# EAGLE board 8051 with lcd (EAGLE 6.5.0)
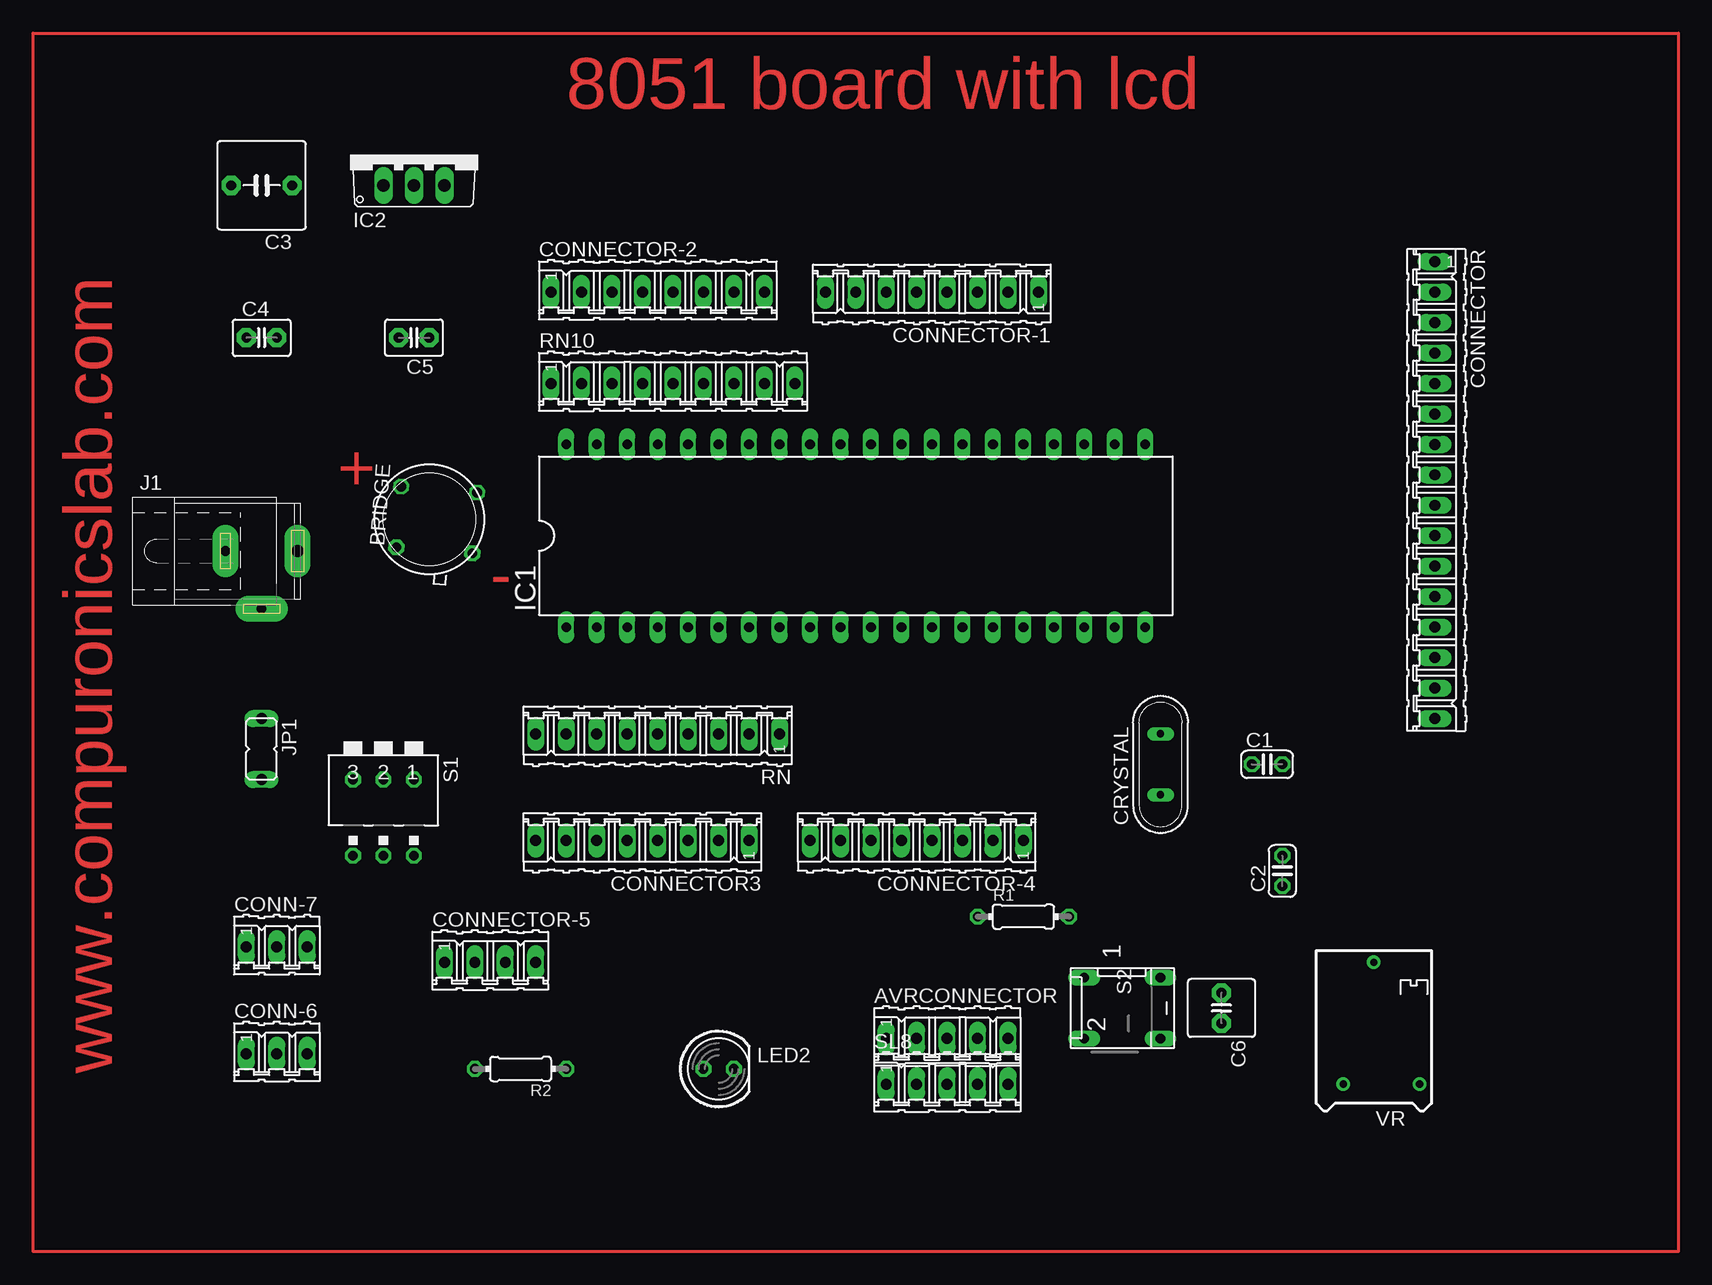
[diagram p0: board, top side]
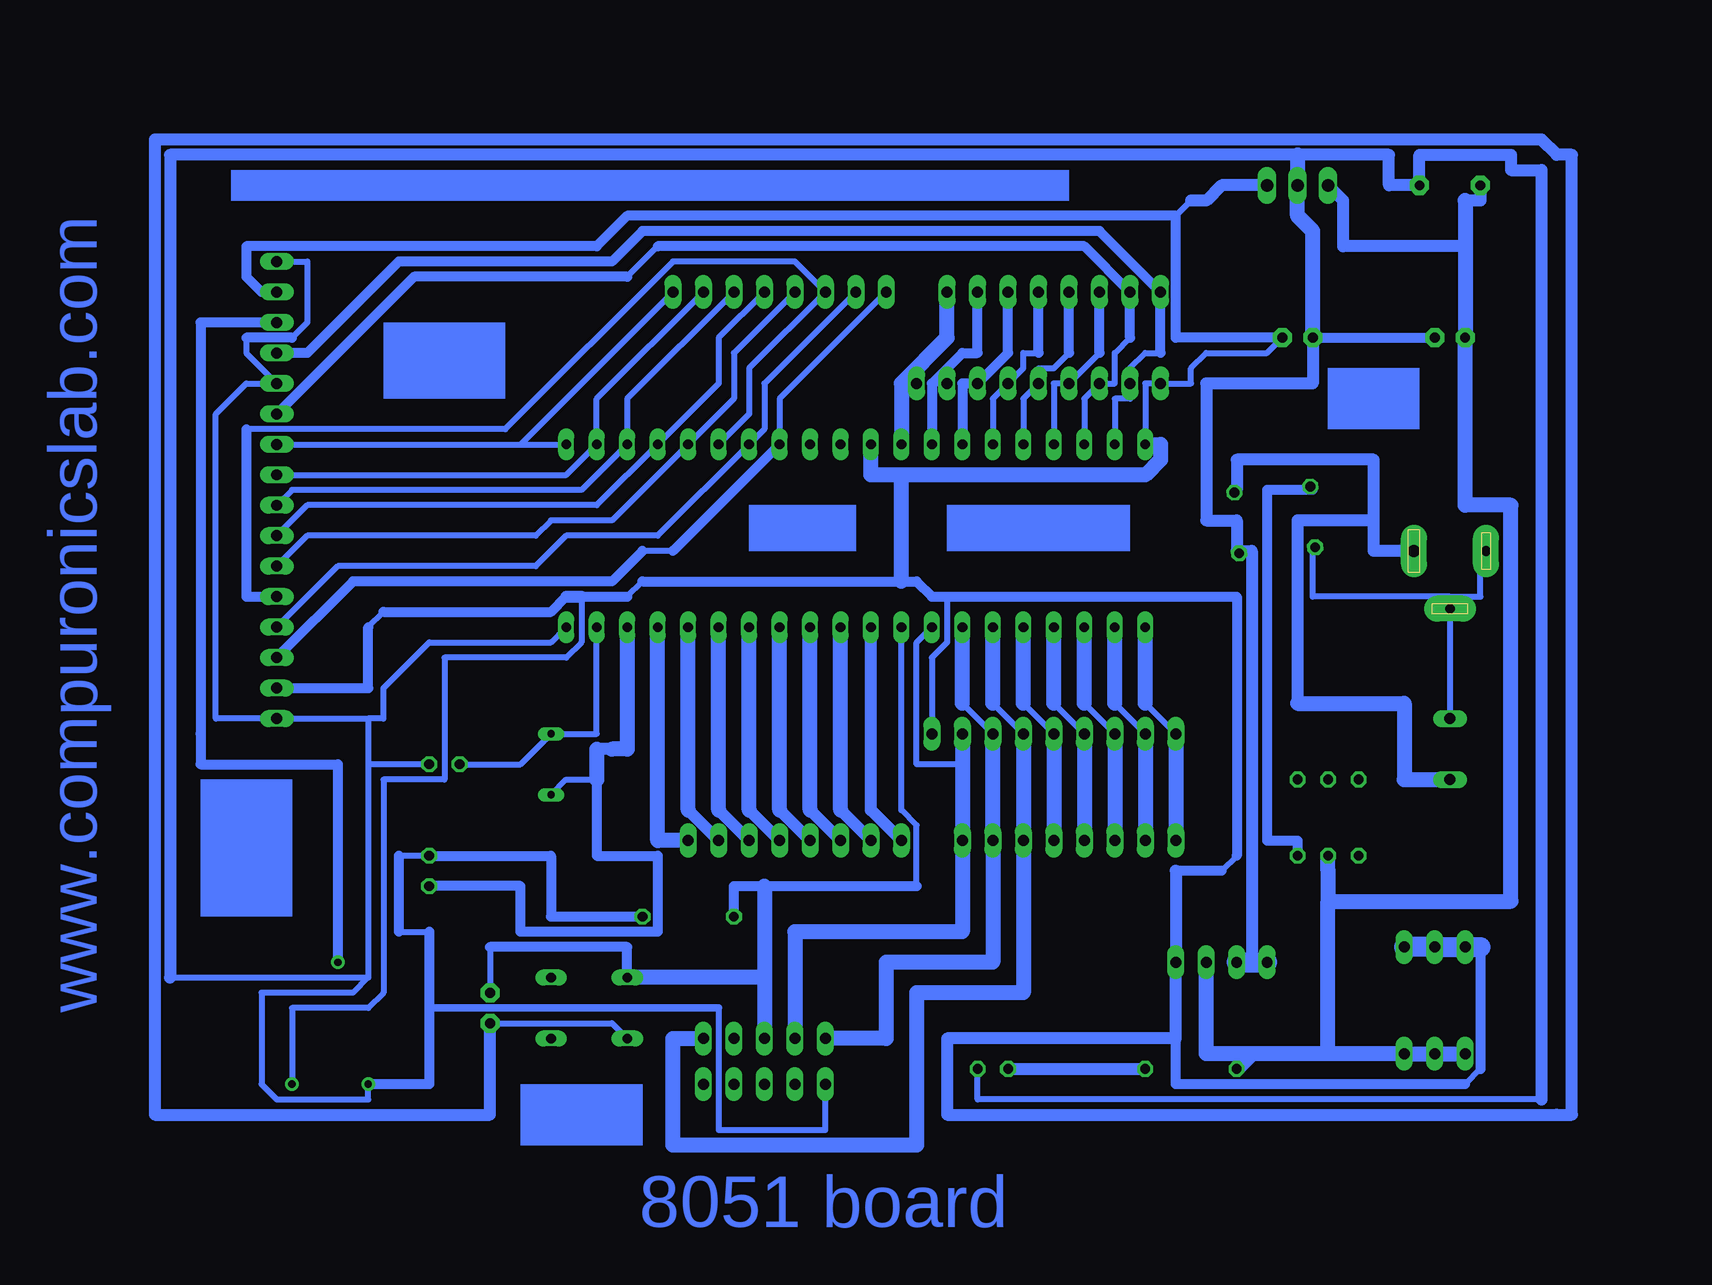
[diagram p1: board, bottom side, seen from below]

No outline drawn. Coordinates in mm, seen from the top.
Copper layers (1*16): Top 0.035mm / dielectric 1.5mm / Bottom 0.035mm
Design rules "default *": minimum track width 20mil, minimum drill 24mil, track to track 20mil, track to pad 8mil, pad to pad 8mil, via to via 8mil, smd to smd 8mil, copper to edge 20mil, drill to drill 8mil, minimum pad ring 10mil, minimum via ring 8mil, stop-mask expansion 8mil, vias tented up to drill 0mil, thermal gap 20mil

## Footprints (pad centres in the part's own frame; a part is rotated, then mirrored left to right if it is on the bottom)
05P = drill 0.914 long: 1 -5.08,0; 2 -2.54,0; 3 0,0; 4 2.54,0; 5 5.08,0
TO39/4 = drill 0.813 octagon: 1 -2.54,-2.54; 2 2.54,-2.54; 3 2.54,3.81; 4 -2.54,3.81
C025-024X044 = drill 0.813 octagon: 1 -1.27,0; 2 1.27,0
C5B7.2 = drill 0.813 pad 1.6 octagon: 1 -2.54,0; 2 2.54,0
C2.5-3 = drill 0.813 pad 1.6 octagon: 1 -1.27,0; 2 1.27,0
C2.5-6 = drill 0.813 pad 1.6 octagon: 1 -1.27,0; 2 1.27,0
03P = drill 0.914 long: 1 -2.54,0; 2 0,0; 3 2.54,0
16P = drill 0.914 long: 1 -19.05,0; 2 -16.51,0; 3 -13.97,0; 4 -11.43,0; 5 -8.89,0; 6 -6.35,0; 7 -3.81,0; 8 -1.27,0; 9 1.27,0; 10 3.81,0; 11 6.35,0; 12 8.89,0; 13 11.43,0; 14 13.97,0; 15 16.51,0; 16 19.05,0
08P = drill 0.914 long: 1 -8.89,0; 2 -6.35,0; 3 -3.81,0; 4 -1.27,0; 5 1.27,0; 6 3.81,0; 7 6.35,0; 8 8.89,0
04P = drill 0.914 long: 1 -3.81,0; 2 -1.27,0; 3 1.27,0; 4 3.81,0
QS = drill 0.61 long: 1 -2.54,0; 2 2.54,0
DIL40 = drill 0.813 long: 1 -24.13,-7.62; 2 -21.59,-7.62; 3 -19.05,-7.62; 4 -16.51,-7.62; 5 -13.97,-7.62; 6 -11.43,-7.62; 7 -8.89,-7.62; 8 -6.35,-7.62; 9 -3.81,-7.62; 10 -1.27,-7.62; 11 1.27,-7.62; 12 3.81,-7.62; 13 6.35,-7.62; 14 8.89,-7.62; 15 11.43,-7.62; 16 13.97,-7.62; 17 16.51,-7.62; 18 19.05,-7.62; 19 21.59,-7.62; 20 24.13,-7.62; 21 24.13,7.62; 22 21.59,7.62; 23 19.05,7.62; 24 16.51,7.62; 25 13.97,7.62; 26 11.43,7.62; 27 8.89,7.62; 28 6.35,7.62; 29 3.81,7.62; 30 1.27,7.62; 31 -1.27,7.62; 32 -3.81,7.62; 33 -6.35,7.62; 34 -8.89,7.62; 35 -11.43,7.62; 36 -13.97,7.62; 37 -16.51,7.62; 38 -19.05,7.62; 39 -21.59,7.62; 40 -24.13,7.62
TO220V = drill 1.016 long: 1 -2.54,-2.54; 2 0,-2.54; 3 2.54,-2.54
SPC4077 = drill 0.8 pad 2.184 long: 1 -3,0; 2 0,-4.8 | drill 1 pad 2.184 long: 3 3,0
JP1 = drill 0.914 long: 1 0,-2.54; 2 0,2.54
LED5MM = drill 0.813 octagon: A -1.27,0; K 1.27,0
0204/7 = drill 0.813 octagon: 1 -3.81,0; 2 3.81,0
09P = drill 0.914 long: 1 -10.16,0; 2 -7.62,0; 3 -5.08,0; 4 -2.54,0; 5 0,0; 6 2.54,0; 7 5.08,0; 8 7.62,0; 9 10.16,0
DA-03 = drill 0.813 octagon: 1 -2.54,-5.08; 2 0,-5.08; 3 2.54,-5.08; 4 2.54,1.27; 5 0,1.27; 6 -2.54,1.27
DP-02 = drill 0.813 long: 1 -2.54,-2.54; 2 2.54,-2.54; 3 2.54,3.81; 4 -2.54,3.81
RTRIM64P = drill 0.61: 1 -2.54,-3.81; 2 7.62,0; 3 -2.54,2.54

## Placement (x,y rotation side)
AVRCONNECTOR  [05P]  60.96,3.81 0 top
BRIDGE  [TO39/4]  19.05,46.99 85.6 top
C1  33pf  [C025-024X044]  87.63,26.67 0 top
C2  33pf  [C025-024X044]  88.9,17.78 90 top
C3  470uf  [C5B7.2]  3.81,74.93 180 top
C4  .01uf  [C2.5-3]  3.81,62.23 0 top
C5  4.7uf  [C2.5-3]  16.51,62.23 180 top
C6  0.1uf  [C2.5-6]  83.82,6.35 270 top
CONN-6  3 pin  [03P]  5.08,2.54 0 top
CONN-7  3 pin  [03P]  5.08,11.43 0 top
CONNECTOR  LCD  [16P]  101.6,49.53 270 top
CONNECTOR3  8 pin  [08P]  35.56,20.32 180 top
CONNECTOR-1  8 pin  [08P]  59.69,66.04 180 top
CONNECTOR-2  8 pin  [08P]  36.83,66.04 0 top
CONNECTOR-4  8 pin  [08P]  58.42,20.32 180 top
CONNECTOR-5  4 pin  [04P]  22.86,10.16 0 top
CRYSTAL  11.0592 mhz  [QS]  78.74,26.67 90 top
IC1  AT89S51  [DIL40]  53.34,45.72 0 top
IC2  7805TV  [TO220V]  16.51,77.47 0 top
J1  [SPC4077]  3.81,44.45 0 top
JP1  TRANSFORMER  [JP1]  3.81,27.94 180 top
LED2  5mm  [LED5MM]  41.91,1.27 0 top
R1  10k  [0204/7]  67.31,13.97 0 top
R2  560E  [0204/7]  25.4,1.27 180 top
RN  10K  [09P]  36.83,29.21 180 top
RN10  10 k  [09P]  38.1,58.42 0 top
S1  ON/ OFF SWITCH  [DA-03]  13.97,20.32 180 top
S2  push switch  [DP-02]  74.93,6.35 270 top
SL8  [05P]  60.96,0 0 top
VR  10k  [RTRIM64P]  96.52,2.54 90 top

## Library data of the parts
AVRCONNECTOR CONN-6 CONN-7 CONNECTOR CONNECTOR3 CONNECTOR-1 CONNECTOR-2 CONNECTOR-4 CONNECTOR-5 RN RN10 SL8 = con-amp-quick; OC_FARNELL: unknown; OC_NEWARK: unknown
BRIDGE IC2 = linear
C1 C2 = rcl
C3-C6 = capacitor-wima
CRYSTAL = special
IC1 = atmel; OC_FARNELL: unknown; OC_NEWARK: unknown
J1 = con-jack; OC_FARNELL: unknown; OC_NEWARK: unknown
JP1 = jumper
LED2 = led
R1 R2 = eagle-ltspice; SPICEMODEL: NONE; SPICEPREFIX: R
S1 = switch-dil; MPN: MCDA03; OC_FARNELL: 1521999; OC_NEWARK: 74M2972
S2 = switch-dil; MPN: MCDP02; OC_FARNELL: 1255233; OC_NEWARK: 26M1095
VR = resistor

## Nets
N$1: C2.1 CRYSTAL.1 IC1.18
N$2: C1.1 CRYSTAL.2 IC1.19
N$4: C3.2 C4.1 CONN-6.1 CONN-6.2 CONN-6.3 CONNECTOR-5.3 IC2.1 R2.2 S1.5
N$5: BRIDGE.2 J1.3 JP1.2
N$6: CONNECTOR-4.8 IC1.10
N$7: CONNECTOR-4.7 IC1.11
N$8: CONNECTOR-4.6 IC1.12
N$9: CONNECTOR-4.5 IC1.13
N$10: CONNECTOR-4.4 IC1.14
N$11: CONNECTOR-4.3 IC1.15
N$12: CONNECTOR-4.2 IC1.16
N$13: CONNECTOR-4.1 IC1.17
N$14: AVRCONNECTOR.3 C6.1 IC1.9 R1.1 S2.1
N$15: AVRCONNECTOR.1 CONNECTOR3.2 IC1.7 RN.3
N$16: BRIDGE.4 J1.1 J1.2 JP1.1
N$17: CONNECTOR3.4 IC1.5 RN.5
N$18: CONNECTOR3.5 IC1.4 RN.6
N$19: CONNECTOR3.6 IC1.3 RN.7
N$20: CONNECTOR3.7 IC1.2 RN.8
N$21: CONNECTOR3.8 IC1.1 RN.9
N$24: CONNECTOR-2.3 IC1.37 RN10.4
N$25: CONNECTOR-2.4 IC1.36 RN10.5
N$26: CONNECTOR-2.5 IC1.35 RN10.6
N$27: CONNECTOR-2.6 IC1.34 RN10.7
N$28: CONNECTOR-2.7 IC1.33 RN10.8
N$29: CONNECTOR-2.8 IC1.32 RN10.9
N$30: CONNECTOR-1.1 CONNECTOR.7 IC1.21
N$31: CONNECTOR-1.2 CONNECTOR.8 IC1.22
N$32: CONNECTOR-1.3 CONNECTOR.9 IC1.23
N$35: CONNECTOR-1.6 CONNECTOR.12 IC1.26
N$38: CONNECTOR.3 VR.2
N$39: C5.1 C6.2 CONN-7.1 CONN-7.2 CONN-7.3 CONNECTOR-5.4 CONNECTOR.2 CONNECTOR.15 IC1.31 IC1.40 IC2.3 RN10.1 RN.1 S2.2 VR.1
N$41: BRIDGE.1 C1.2 C2.2 C3.1 C4.2 C5.2 CONNECTOR-5.1 CONNECTOR-5.2 CONNECTOR.1 CONNECTOR.5 CONNECTOR.16 IC1.20 IC2.2 LED2.K R1.2 SL8.1 VR.3
N$42: AVRCONNECTOR.5 CONNECTOR3.3 IC1.6 RN.4
N$43: LED2.A R2.1
N$45: AVRCONNECTOR.2 CONNECTOR3.1 IC1.8 RN.2
N$47: BRIDGE.3 S1.6
N$48: CONNECTOR-2.2 CONNECTOR.6 IC1.38 RN10.3
N$51: CONNECTOR-1.4 CONNECTOR.10 IC1.24
N$52: CONNECTOR-1.5 CONNECTOR.11 IC1.25
N$54: CONNECTOR-1.7 CONNECTOR.13 IC1.27
N$55: CONNECTOR-1.8 CONNECTOR.14 IC1.28
N$58: CONNECTOR-2.1 CONNECTOR.4 IC1.39 RN10.2

## Tracks (layer width: path | path; a pad name or v marks a point on that pad's centre or on a via)
N$1
  Bottom 0.508: CRYSTAL.1 77.47,25.4 74.93,25.4
  Bottom 0.813: C2.1 81.28,16.51 81.28,12.7 69.85,12.7 69.85,19.05 74.93,19.05 74.93,25.4
  Bottom 1.016: 73.66,27.94 74.93,27.94
  Bottom 1.27: 74.93,27.94 74.93,25.4 | 73.66,27.94 72.39,27.94 IC1.18
N$2
  Bottom 0.508: C1.1 81.28,26.67 CRYSTAL.2 74.93,29.21 IC1.19
N$3
  Top 0.254: -15.24,87.63 121.92,87.63 121.92,-13.97 -15.24,-13.97 -15.24,87.63
N$4
  Bottom 0.508: 2.54,73.66 2.54,69.85
  Bottom 1.016: IC2.1 12.7,73.66 12.7,69.85 2.54,69.85 | C3.2 1.27,73.66 2.54,73.66
  Bottom 1.27: 2.54,73.66 C4.1 2.54,48.26 -1.27,48.26 -1.27,15.24 13.97,15.24 | CONN-6.1 CONN-6.2 CONN-6.3 13.97,2.54 | 13.97,2.54 13.97,15.24 | S1.5 13.97,17.78 13.97,15.24 | 20.32,2.54 R2.2 | 13.97,2.54 20.32,2.54 | 20.32,2.54 24.13,2.54 CONNECTOR-5.3
N$5
  Bottom 0.508: 21.59,49.53 BRIDGE.2
  Bottom 1.016: 21.59,49.53 21.59,52.07 10.16,52.07 10.16,46.99 | J1.3 10.16,44.45 10.16,46.99 | 16.51,31.75 16.51,46.99 10.16,46.99
  Bottom 1.27: 16.51,31.75 7.62,31.75 7.62,25.4 JP1.2
N$6
  Bottom 1.016: IC1.10 52.07,22.86 CONNECTOR-4.8
N$7
  Bottom 1.016: CONNECTOR-4.7 54.61,22.86
  Bottom 1.27: 54.61,22.86 IC1.11
N$8
  Bottom 1.016: CONNECTOR-4.6 57.15,22.86
  Bottom 1.27: 57.15,22.86 IC1.12
N$9
  Bottom 1.016: CONNECTOR-4.5 59.69,22.86
  Bottom 1.27: 59.69,22.86 IC1.13
N$10
  Bottom 1.016: CONNECTOR-4.4 62.23,22.86
  Bottom 1.27: 62.23,22.86 IC1.14
N$11
  Bottom 1.016: CONNECTOR-4.3 64.77,22.86
  Bottom 1.27: 64.77,22.86 IC1.15
N$12
  Bottom 1.016: CONNECTOR-4.2 67.31,22.86
  Bottom 1.27: 67.31,22.86 IC1.16
N$13
  Bottom 1.27: IC1.17 69.85,20.32 CONNECTOR-4.1
N$14
  Bottom 0.508: IC1.9 49.53,22.86 48.26,21.59 48.26,16.51 | 83.82,11.43 C6.1
  Bottom 0.813: 48.26,16.51 60.96,16.51 63.5,16.51 R1.1 | S2.1 72.39,11.43 83.82,11.43
  Bottom 1.27: 60.96,16.51 60.96,8.89 | 60.96,8.89 AVRCONNECTOR.3 | 60.96,8.89 S2.1
N$15
  Bottom 0.508: RN.3 44.45,31.75
  Bottom 1.27: 44.45,31.75 IC1.7 | AVRCONNECTOR.1 50.8,3.81 50.8,10.16 41.91,10.16 CONNECTOR3.2 RN.3
N$16
  Bottom 0.508: 3.81,40.64 5.08,40.64 | 5.08,40.64 15.24,40.64 15.24,44.45 BRIDGE.4 | 3.81,40.64 J1.2 | J1.2 JP1.1 | 3.81,40.64 1.27,40.64 1.27,44.45 J1.1 | 5.08,40.64 J1.2
N$17
  Bottom 0.508: RN.5 39.37,31.75
  Bottom 1.27: 39.37,31.75 IC1.5 | RN.5 CONNECTOR3.4
N$18
  Bottom 0.508: RN.6 36.83,31.75
  Bottom 1.27: 36.83,31.75 IC1.4 | RN.6 CONNECTOR3.5
N$19
  Bottom 0.508: RN.7 34.29,31.75
  Bottom 1.27: 34.29,31.75 IC1.3 | RN.7 CONNECTOR3.6
N$20
  Bottom 0.508: RN.8 31.75,31.75
  Bottom 1.27: 31.75,31.75 IC1.2 | RN.8 CONNECTOR3.7
N$21
  Bottom 0.508: RN.9 29.21,31.75
  Bottom 1.27: 29.21,31.75 IC1.1 | RN.9 CONNECTOR3.8
N$24
  Bottom 0.508: IC1.37 36.83,58.42 RN10.4 33.02,60.96
  Bottom 0.813: 33.02,60.96 CONNECTOR-2.3
N$25
  Bottom 0.508: IC1.36 39.37,57.15 RN10.5 38.1,59.69 36.83,59.69 35.56,60.96
  Bottom 0.813: 35.56,60.96 CONNECTOR-2.4
N$26
  Bottom 0.508: IC1.35 41.91,57.15 RN10.6 39.37,59.69 39.37,60.96 38.1,60.96
  Bottom 0.813: 38.1,60.96 CONNECTOR-2.5
N$27
  Bottom 0.813: IC1.34 44.45,58.42 RN10.7 40.64,60.96 CONNECTOR-2.6
N$28
  Bottom 0.508: RN10.8 46.99,58.42
  Bottom 0.813: IC1.33 46.99,58.42 44.45,60.96 43.18,60.96 CONNECTOR-2.7
N$29
  Bottom 1.27: 49.53,58.42 IC1.32 | RN10.9 49.53,58.42 | CONNECTOR-2.8 45.72,62.23 49.53,58.42
N$30
  Bottom 0.508: CONNECTOR.7 81.28,53.34 | 81.28,53.34 IC1.21 | 81.28,53.34 CONNECTOR-1.1
N$31
  Bottom 0.508: CONNECTOR.8 77.47,50.8 IC1.22 74.93,57.15 CONNECTOR-1.2
N$32
  Bottom 0.508: CONNECTOR-1.3 72.39,57.15 IC1.23 76.2,49.53 100.33,49.53 CONNECTOR.9
N$35
  Bottom 0.508: IC1.26 62.23,55.88 62.23,59.69 CONNECTOR-1.6 58.42,68.58 68.58,68.58 82.55,54.61 104.14,54.61
  Bottom 0.813: CONNECTOR.12 104.14,40.64 104.14,43.18 104.14,54.61
N$38
  Bottom 0.813: VR.2 96.52,26.67 107.95,26.67 107.95,29.21 107.95,63.5 CONNECTOR.3
N$39
  Bottom 0.508: 102.87,66.04 CONNECTOR.2 | 25.4,73.66 26.67,72.39 | IC1.40 29.21,58.42 RN10.1 25.4,58.42 25.4,59.69 24.13,60.96 19.05,60.96 C5.1 | 1.27,1.27 2.54,0 | VR.1 100.33,6.35 93.98,6.35 92.71,7.62 92.71,25.4 87.63,25.4 87.63,35.56 77.47,35.56 76.2,36.83 76.2,40.64 | 93.98,38.1 92.71,39.37 | RN.1 46.99,35.56 45.72,36.83 45.72,40.64 | 72.39,40.64 71.12,41.91 | 21.59,19.05 22.86,17.78 | S2.2 73.66,5.08 C6.2
  Bottom 0.813: 102.87,66.04 104.14,67.31 104.14,69.85 74.93,69.85 72.39,72.39 26.67,72.39 26.67,62.23 C5.1 | 26.67,3.81 26.67,0 2.54,0 | 1.27,11.43 1.27,1.27 | 77.47,40.64 78.74,39.37 92.71,39.37 | 93.98,38.1 93.98,33.02 CONNECTOR.15 | 71.12,41.91 49.53,41.91 48.26,41.91 46.99,40.64 45.72,40.64 21.59,40.64 21.59,19.05 | 76.2,40.64 72.39,40.64 | 22.86,17.78 26.67,17.78
  Bottom 1.016: 25.4,73.66 24.13,73.66 22.86,74.93 IC2.3 | 77.47,40.64 76.2,40.64 | 26.67,17.78 CONNECTOR-5.4 26.67,3.81 45.72,3.81 45.72,-2.54 -5.08,-2.54 -6.35,-2.54 -6.35,77.47 -5.08,77.47 -3.81,78.74 111.76,78.74 111.76,-2.54 83.82,-2.54 C6.2
  Bottom 1.27: IC1.31 52.07,50.8 49.53,50.8 | 49.53,50.8 29.21,50.8 27.94,52.07 27.94,53.34 IC1.40 | 49.53,41.91 49.53,50.8
  Bottom 1.676: 1.27,11.43 CONN-7.1 CONN-7.2 CONN-7.3
N$41
  Bottom 0.508: 91.44,12.7 88.9,12.7 | C2.2 91.44,19.05 | SL8.1 55.88,-3.81 64.77,-3.81 64.77,6.35 | 104.14,62.23 104.14,60.96 CONNECTOR.5 104.14,58.42 106.68,55.88 106.68,30.48 CONNECTOR.16 93.98,30.48 | 100.33,62.23 99.06,63.5 99.06,68.58 CONNECTOR.1 | 93.98,30.48 92.71,30.48 92.71,33.02 88.9,36.83 78.74,36.83 IC1.20 | 93.98,30.48 93.98,26.67 | VR.3 93.98,-1.27 101.6,-1.27 102.87,0 102.87,7.62 95.25,7.62 93.98,8.89 | 93.98,26.67 93.98,8.89 | C1.2 93.98,26.67 | LED2.K 43.18,-1.27 -3.81,-1.27 | 110.49,8.89 93.98,8.89
  Bottom 0.61: 88.9,6.35 64.77,6.35
  Bottom 0.813: VR.3 88.9,0 88.9,6.35 88.9,12.7 | 91.44,19.05 91.44,12.7 | R1.2 78.74,13.97 78.74,19.05 C2.2 | 100.33,62.23 104.14,62.23 | C5.2 C4.2 | 21.59,44.45 BRIDGE.1
  Bottom 1.016: C5.2 15.24,58.42 24.13,58.42 24.13,46.99 21.59,46.99 21.59,44.45 20.32,44.45 20.32,10.16 | -3.81,-1.27 -3.81,76.2 -1.27,76.2 -1.27,77.47 6.35,77.47 C3.1 8.89,74.93 8.89,77.47 16.51,77.47 110.49,77.47 110.49,8.89
  Bottom 1.27: C5.2 15.24,71.12 16.51,72.39 IC2.2 16.51,77.47
  Bottom 1.676: CONNECTOR-5.2 20.32,10.16 CONNECTOR-5.1
N$42
  Bottom 0.508: RN.4 41.91,31.75
  Bottom 1.27: 41.91,31.75 IC1.6 | RN.4 CONNECTOR3.3 39.37,7.62 48.26,7.62 48.26,-5.08 68.58,-5.08 68.58,3.81 AVRCONNECTOR.5
N$43
  Bottom 1.016: LED2.A R2.1
N$45
  Bottom 0.508: IC1.8 48.26,36.83 48.26,26.67 44.45,26.67 RN.2
  Bottom 1.27: RN.2 CONNECTOR3.1 44.45,12.7 58.42,12.7 AVRCONNECTOR.2
N$47
  Bottom 0.508: 15.24,49.53 BRIDGE.3
  Bottom 0.813: S1.6 16.51,20.32 19.05,20.32 19.05,49.53 15.24,49.53
N$48
  Bottom 0.508: IC1.38 34.29,57.15 RN10.3 31.75,58.42 31.75,60.96 30.48,62.23 | 69.85,69.85 72.39,67.31
  Bottom 0.813: 30.48,62.23 CONNECTOR-2.2 34.29,69.85 69.85,69.85 | CONNECTOR.6 90.17,67.31 72.39,67.31
N$51
  Bottom 0.508: CONNECTOR-1.4 64.77,62.23 64.77,58.42 IC1.24 74.93,48.26 99.06,48.26 CONNECTOR.10
N$52
  Bottom 0.508: CONNECTOR-1.5 63.5,60.96 63.5,57.15 IC1.25 73.66,46.99 78.74,46.99 80.01,45.72 99.06,45.72 CONNECTOR.11
N$54
  Bottom 0.508: CONNECTOR-1.7 60.96,58.42 60.96,54.61 IC1.27 69.85,45.72 77.47,45.72 80.01,43.18 96.52,43.18 CONNECTOR.13
N$55
  Bottom 0.508: IC1.28 59.69,57.15 CONNECTOR-1.8 | 68.58,44.45 71.12,44.45
  Bottom 0.813: CONNECTOR.14 95.25,41.91 73.66,41.91 71.12,44.45 | IC1.28 68.58,44.45
N$58
  Bottom 0.508: IC1.39 31.75,57.15 30.48,57.15 RN10.2 30.48,59.69 29.21,60.96 27.94,60.96
  Bottom 0.813: 27.94,60.96 CONNECTOR-2.1 33.02,71.12 71.12,71.12 73.66,68.58 91.44,68.58 99.06,60.96 CONNECTOR.4
(copper drawn outside any net)
  shapes: Bottom area x7

## Text on the board
Top: 8051 board with lcd | www.compuronicslab.com | + | -
Bottom: www.compuronicslab.com | 8051 board